# Altium PCB PCB.PcbDoc
Units mil, origin at the board's own origin, x right, y up, seen from the top; angles counter-clockwise.
Board outline 2285 x 2730 mil, 2 copper layers (Top Layer, Bottom Layer); 37 components, 18 nets, 92 pads, 0 vias.
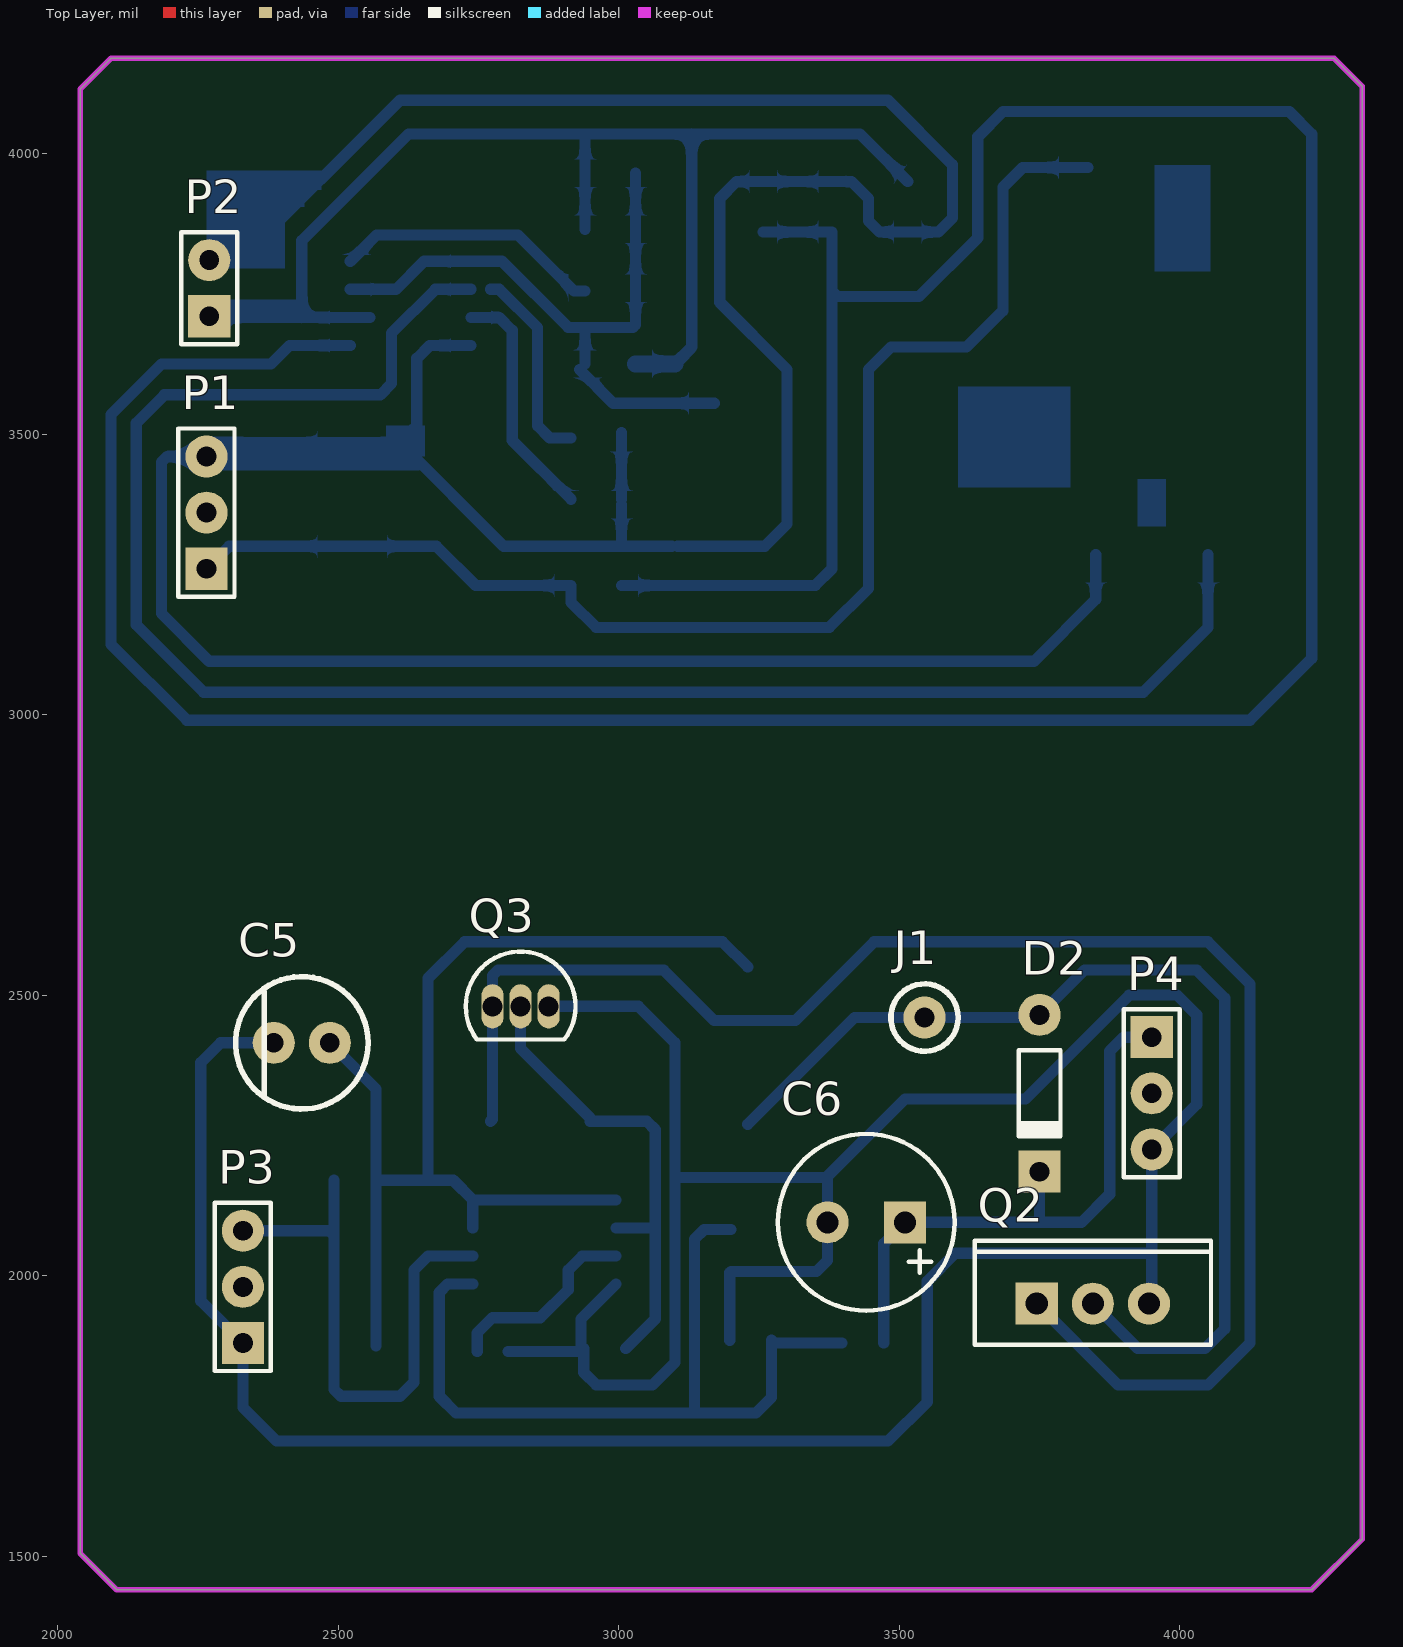
[diagram p0: Top Layer view]
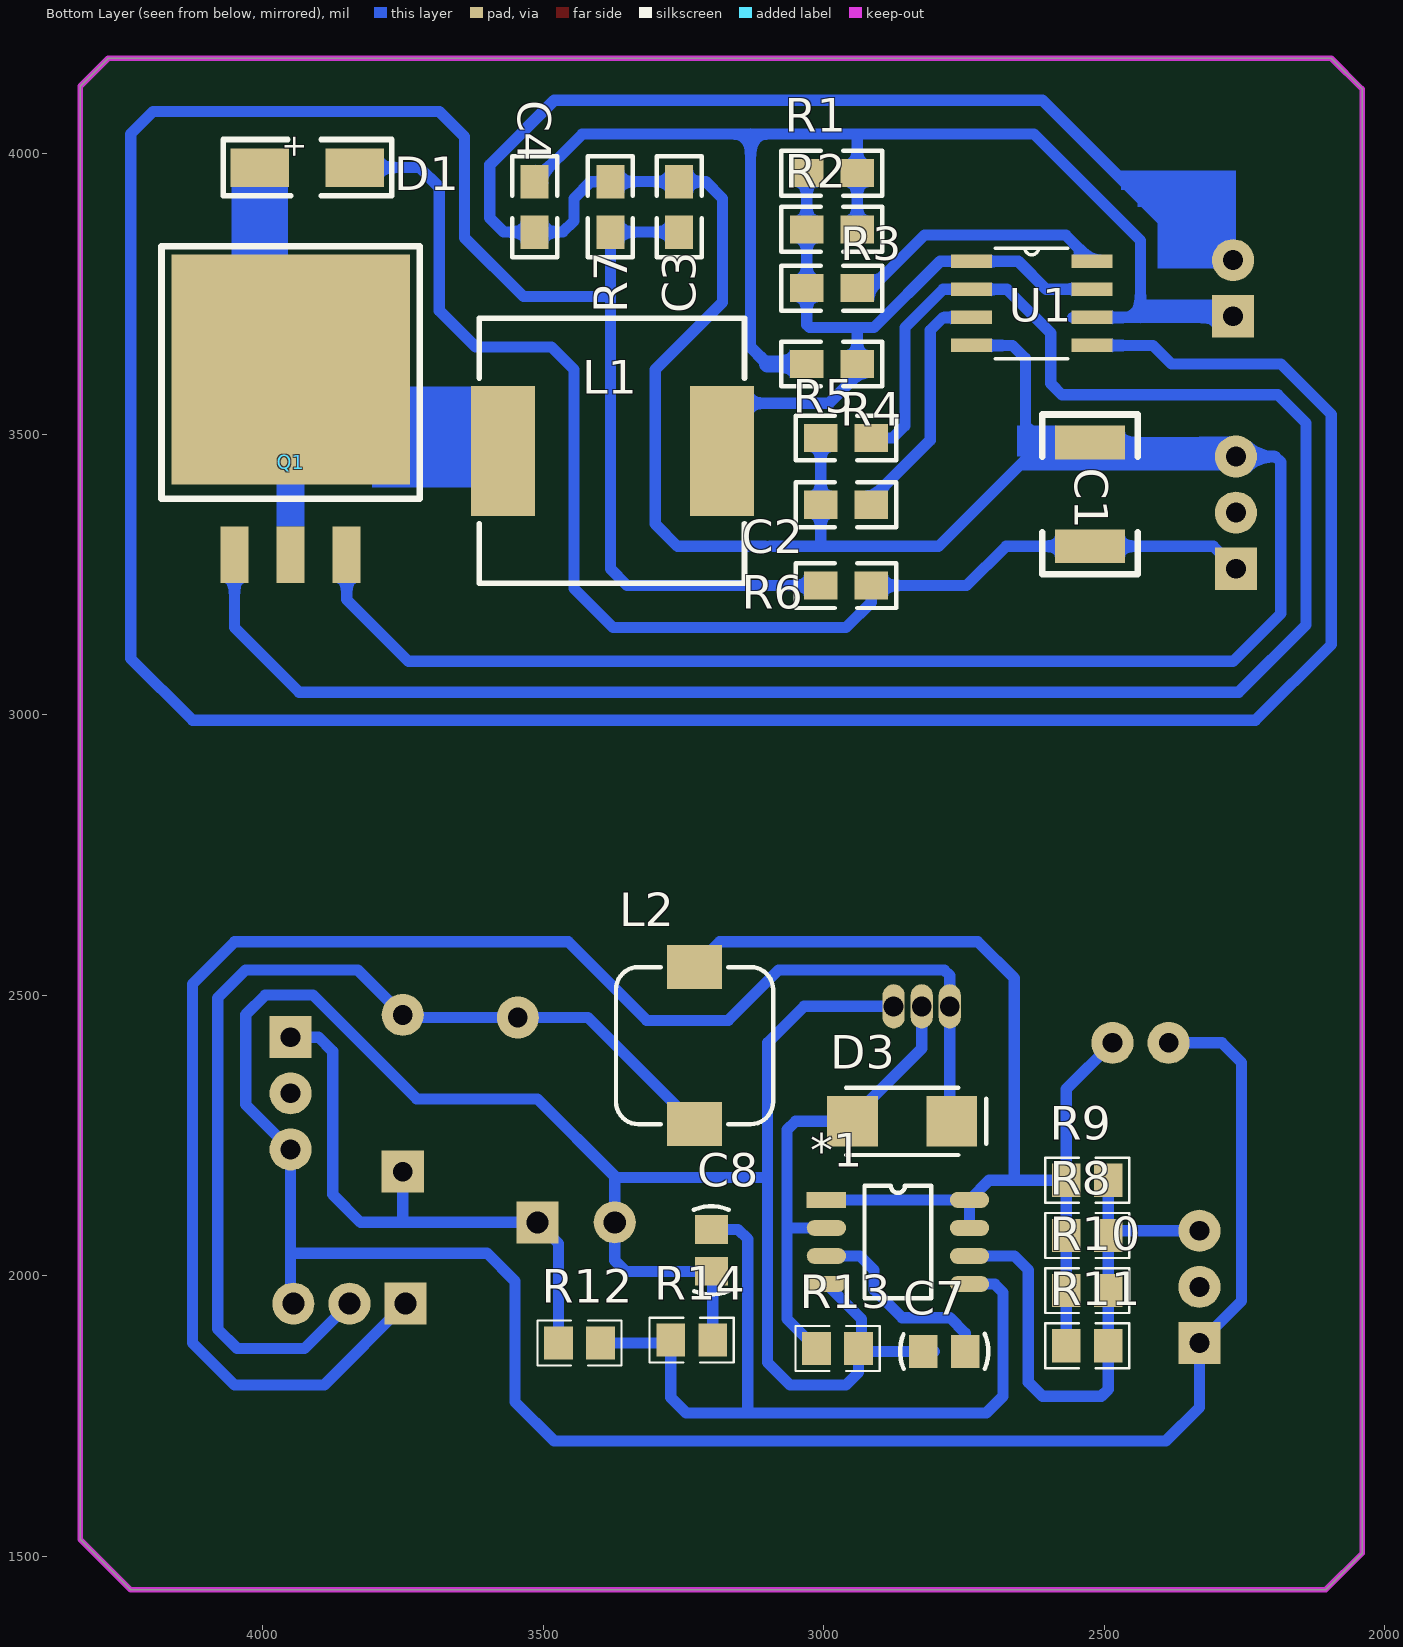
[diagram p1: Bottom Layer view, seen from below]

## Layer stack, top to bottom
Top Solder: solder mask 0.4, Solder Resist, Dk 3.5
Top Layer: signal copper 1.4
Dielectric 1: dielectric 12.6, FR-4, Dk 4.8
Bottom Layer: signal copper 1.4
Bottom Solder: solder mask 0.4, Solder Resist, Dk 3.5

## Board outline
2040,1505 2040,4115 2095,4170 4275,4170 4325,4120 4325,1530 4235,1440 2105,1440

## Design rules (kind name [scope] priority, off if disabled: settings)
Clearance [All] p1: gap=15
PolygonConnect [All] p1: connectstyle=Relief reliefconductorwidth=10 reliefentries=4 polygonreliefangle="90 Angle" airgapwidth=10
RoutingVias [All] p1: holewidth=28 width=50 viastyle="Through Hole" minholewidth=28 minwidth=50 maxholewidth=28 maxwidth=50
SolderMaskExpansion [All] p1: expansion=4
Width [All] p1: maxlimit=100 minlimit=8 preferedwidth=20
30 further rules are at their usual default settings.

## Classes and differential pairs
component class SCH: *1 C1 C2 C3 C4 C5 C6 C7 C8 D1 D2 D3 J1 L1 L2 P1 P2 P3 P4 Q1 Q2 Q3 R3 R4 R5 R6 R7 R8 R9 R10 R11 R12 R13 R14 U1

## Components (designator, comment, footprint, x,y, rotation, side; value= is the part's Value field where it differs from the comment)
*1 "MC34063" SOP-8 2995,2135 r180 bottom
C1 "Cap Pol3" 1812 2525,3300 r90 bottom
C2 "Cap" 0805 3005,3374 r180 bottom
C3 "Cap" 0805 3257.5,3950 r270 bottom
C4 "Cap" 0805 3515,3860 r90 bottom
C5 "Cap Pol" C-RB-6 2435,2415 r180 top
C6 "Cap Pol" C-RB-8 3510,2095 r180 top
C7 "Cap" C-RAD-0805 2785,1865 r180 bottom
C8 "Cap" C-RAD-0805 3200,2045 r90 bottom
D1 "FR107" DO-214AC 4005,3975 r180 bottom
D2 "Diode" DO-35 3750,2325 r270 top
D3 "Diode" DIODE-SMA 2860,2275 r180 bottom
J1 "CHECK" CHECK-A 3545,2460 r0 top
L1 "330uH" 330UH 3571,3470 r180 bottom
L2 "Inductor" L-SMD-7 3230,2410 r90 bottom
P1 "Header 3" HDR3X1_A 2265,3260 r90 top
P2 "Header 2" HDR2X1_A 2270,3710 r90 top
P3 "Header 3" HDR3X1_A 2330,1880 r90 top
P4 "Header 3" HDR3X1_A 3950,2425 r270 top
Q1 "IRF630" TO-263 4050,3285 r180 bottom
Q2 "IRF740" TO-220AB 3845,1950 r0 top
Q3 "MPSA55" TO-92A 2825,2480 r270 top
R1 "Res2" 0805 3030,3965 r180 bottom
R2 "Res2" 0805 3030,3865 r180 bottom
R3 "Res2" 0805 3030,3760 r180 bottom
R4 "Res2" 0805 2940,3625 r0 bottom
R5 "Res2" 0805 3005,3493 r180 bottom
R6 "Res2" 0805 2915,3230 r0 bottom
R7 "Res2" 0805 3380,3950 r270 bottom
R8 "Res1" 0805-1 2530,2071.67 r0 bottom
R9 "Res1" 0805-1 2530,2170 r0 bottom
R10 "Res1" 0805-1 2530,1973.33 r0 bottom
R11 "Res1" 0805-1 2530,1875 r0 bottom
R12 "Res1" 0805-1 3435,1880 r0 bottom
R13 "Res1" 0805-1 2975,1870 r0 bottom
R14 "Res1" 0805-1 3235,1885 r0 bottom
U1 "MC34063ADR2G" SO-8-M 2629,3733 r180 bottom

## Footprints (in the part's own frame and the unit in brackets; to place one, negate y for a bottom-side part, rotate by r counter-clockwise, add the part's x,y. Pads: shape width x height; smd on the part's side, far side on the other; paste and mask are expansions set on the pad)
330UH [mm]
  rect 2.9x5.9 smd: 1(0,0) 2(9.9,0)
  silkscreen extent -1.08,-6 10.92,6
0805 [mil]
  rect 60x50 smd: 1(0,0) 2(90,0)
  silkscreen extent -45,-40 135,40
0805-1 [mm] "贴片带丝印"
  rect 1.3x1.5 smd: 1(-0.95,0) 2(0.95,0)
  silkscreen extent -1.91,-1.02 1.91,1.02, body extent -1.14,-0.51 1.14,0.51, height 1
1812 [mil]
  rect 60x125 smd: 1(0,0) 2(185,0)
  silkscreen extent -50,-85 235,85
C-RAD-0805 [mm] "贴片电容"
  rect 1.3x1.5 smd: 1(-0.95,0) 2(0.95,0)
  silkscreen extent -2,-0.79 2,0.79, body extent -1.27,-0.64 1.27,0.64, height 0.9
C-RB-6 [mil]
  round 75 hole 35: 1(-50,0) 2(50,0)
  silkscreen extent -118,-118 118,118, body extent -118,-118 118,118, height 472
C-RB-8 [mm] "35V 220UF电容"
  rect 1.905x1.905 hole 1: 1(0,0)
  round 1.905 hole 1: 2(3.5,0)
  silkscreen extent -2.25,-4 5.75,4
CHECK-A [mm] "Connector; Plug"
  round 1.905 hole 0.9: 1(0,0)
  silkscreen extent -1.52,-1.52 1.52,1.52
DIODE-SMA [mm] "贴片二极管"
  rect 2.3x2.3 smd: 1(-2.25,0) 2(2.25,0)
  silkscreen extent -2.54,-1.52 3.81,1.52, body extent -2.92,-1.4 2.92,1.4, height 3
DO-35 [mm] "Diode, Axial; Body 3.8 x 1.9 mm (LxDia. max), Lead Dia. 0.53 mm (max)"
  round 1.905 hole 0.9: 1(-3.55,0)
  rect 1.905x1.905 hole 0.9: 2(3.55,0)
  silkscreen extent -1.95,-0.95 2.05,0.95
DO-214AC [mm]
  rect 2.65x1.75 smd: 1(4.3,0) 3(0,0)
  silkscreen extent -1.65,-1.27 5.97,1.27
HDR2X1_A [mm] "Connector; Header; 2 Position"
  rect 1.905x1.905 hole 0.9: 1(0,0)
  round 1.905 hole 0.9: 2(2.54,0)
  silkscreen extent -1.27,-1.27 3.81,1.27
HDR3X1_A [mm] "Connector; Header; 3 Position"
  rect 1.905x1.905 hole 0.9: 1(0,0)
  round 1.905 hole 0.9: 2(2.54,0) 3(5.08,0)
  silkscreen extent -1.27,-1.27 6.35,1.27
L-SMD-7 [mm] "贴片电感7*7"
  rect 2x2.5 smd: 1(-3.556,0) 2(3.556,0)
  silkscreen extent -3.56,-3.56 3.56,3.56, body extent -3.56,-3.56 3.56,3.56, height 4
SO-8-M [mil]
  rect 73x24 smd: 1(-107.5,75) 2(-107.5,25) 3(-107.5,-25) 4(-107.5,-75) 5(107.5,-75) 6(107.5,-25) 7(107.5,25) 8(107.5,75)
  silkscreen extent -65,-99 65,99
SOP-8 [mm]
  rect 1.78x0.72 smd: 1(0,0)
  oval 1.78x0.72 smd: 2(0,-1.27) 3(0,-2.54) 4(0,-3.81) 5(6.48,-3.81) 6(6.48,-2.54) 7(6.48,-1.27) 8(6.48,0)
  silkscreen extent 1.72,-4.45 4.76,0.63, body extent 0.63,-4.45 5.71,0.63, height 10
TO-92A [mm]
  oval 2x1 hole 0.9: 1(0,-1.27) 2(0,0) 3(0,1.27)
  silkscreen extent -2.48,-2.48 1.5,2.48
TO-220AB [mm] "TO, Thru-Hole, Vertical, Heatsink Mounted; 3 In-Line Leads; Pitch 2.54 mm"
  round 1.905 hole 1: D(0,0) S(2.54,0)
  rect 1.905x1.905 hole 1: G(-2.54,0)
  silkscreen extent -5.35,-1.85 5.35,2.85, body extent -5.33,-1.78 5.33,2.79, height 4
TO-263 [mil]
  rect 50x100 smd: 1(0,0) 2(100,0) 3(200,0)
  rect 425x410 smd: 2(100,330)
  silkscreen extent -130,100 330,550

## Part data
C1: "Polarized Capacitor (Surface Mount)"
C2 C3 C4: "Capacitor"
C5 C6: "极性电解电容"
C7 C8: "无极性电容"
D1: library part "Diode 18TQ045", "Schottky Rectifier"
D2 D3: "二极管"
J1: "测试点"
L1: library part L
L2: "电感"
P1 P2 P3 P4: "接插件"
Q1: "N-Channel MOSFET"
Q2: library part MOSFET-N, "N-Channel MOSFET"
Q3: library part S8550, "PNP三极管"
R1 R2 R3 R4 R5 R6 R7: "Resistor"
R8 R9 R10 R11 R12 R13 R14: "贴片电阻"
U1: library part MC34063ACD-TR, "Imported"

## Nets (pads, with @x,y where several pads share a name; then routed paths per layer and width w, separated by ;. In a path a pad name is that pad's centre, name@x,y a point inside that pad or via, vN(x,y) a via of type N, cw(c..) or ccw(c..) an arc to the next point about the centre after c; other vN are vias at no path point)
GND: C1.2 C2.1 C3.1 C4.1 P1.3 P2.2 Q1.3 R5.1 R7.1 U1.4 | length 6485.9
  Bottom Layer w20: P2.2 2325,3810 2610,4095 3480,4095 3595,3980 3595,3885 3570,3860 C4.1 3465,3860 3445,3880 3445,3920 3415,3950 R7.1 C3.1 3210,3950 3180,3920 3180,3735 3300,3615 3300,3340 3260,3300 3105,3300 ; U1.4 2663,3658 2640,3635 2640,3515 2610,3485 ; C2.1 3005,3305 3000,3300 ; C2.1@3005,3384 R5.1 R5.1@3005,3503 ; 3095,3300 3000,3300 ; Q1.3 3850,3205 3740,3095 2270,3095 2185,3180 2185,3450 2195,3460 P1.3 2290,3485 C1.2 2610,3485 ; 2610,3485 2795,3300 3000,3300
GND2: *1.4 C5.2 C6.2 C7.1 C8.1 P3.1 P4.3 Q2.S Q3.3 R13.1 R14.1 | length 6101.3
  Bottom Layer w20: C5.2 2290,2415 2255,2380 2255,1955 P3.1 2330,1765 2390,1705 3480,1705 3550,1775 3550,1990 3600,2040 3945,2040 ; C7.1@2802.4,1865 2932.6,1865 2932.6,1922.6 *1.4 ; Q3.3 3035,2480 3100,2415 3100,1845 3060,1805 2960,1805 2937.6,1827.4 R13.1 ; 3105,2175 3372.2,2175 ; R14.1 3197.6,2005.2 C8.1 3352.6,2007.6 3372.2,2027.2 C6.2 3372.2,2177.2 3510,2315 3725,2315 3910,2500 3995,2500 4030,2465 4030,2305 P4.3 3950,1955 Q2.S
Net*1_1: *1.1 *1.7 *1.8 C5.1 L2.2 R8.2 R9.2 R10.2 R11.2 | length 2041.8
  Bottom Layer w20: C5.1 2567.4,2332.6 R9.2 ; R11.2 R10.2 R8.2 R9.2 ; *1.7 *1.8 ; *1.1 *1.8 ; L2.2 3185,2595 2725,2595 2660,2530 2660,2170 ; R9.2 2660,2170 ; 2660,2170 2704.88,2170 *1.8
Net*1_2: *1.2 D3.1 Q3.2 R13.2 | length 864.7
  Bottom Layer w20: Q3.2 2825,2405 2948.58,2281.42 D3.1 3050,2275 3065,2260 3065,2090 3060,2085 3065,2080 3065,1922.6 R13.2 ; *1.2 3065,2085
Net*1_3: *1.3 C7.2 | length 357.4
  Bottom Layer w20: C7.2 2747.6,1897.6 2775,1925 2860,1925 2910,1975 2910,2010 2935,2035 *1.3
Net*1_5: *1.5 C8.2 R12.1 R14.2 | length 1479.2
  Bottom Layer w20: *1.5 2695,1985 2680,1970 2680,1785 2710,1755 3244.8,1755 3272.4,1782.6 R14.2 3277.4,1880 R12.1 ; 3135,1755 3135,2065 3152.4,2082.4 C8.2
NetC2_2: C2.2 U1.3 | length 427.5
  Bottom Layer w20: U1.3 2787,3708 2810,3685 2810,3489 C2.2@2915,3384
NetC3_2: C3.2 R6.2 R7.2 U1.5 | length 6291.7
  Bottom Layer w20: U1.5 2413,3658 2380,3625 2185,3625 2095,3535 2095,3125 2230,2990 4125,2990 4235,3100 4235,4035 4195,4075 3685,4075 3640,4030 3640,3850 3535,3745 3390,3745 3380,3755 ; R6.2 3350,3230 3380,3260 3380,3755 ; C3.2 R7.2 3380,3755
NetD1_3: D1.3 L1.1 Q1.2
NetD2_1: D2.1 J1.1 L2.1 Q2.D | length 1857.3
  Bottom Layer w20: L2.1 3420,2460 J1.1 3745.24,2460 D2.1 3830.24,2545 4030,2545 4080,2495 4080,1905 4045,1870 3925,1870 Q2.D
NetD3_2: D3.2 Q2.G Q3.1 | length 2853.1
  Bottom Layer w20: D3.2 2775,2278.58 Q3.1 2775,2535 2785,2545 3080,2545 3170,2455 3315,2455 3455,2595 4050,2595 4125,2520 4125,1880 4050,1805 3890,1805 Q2.G
NetL1_2: L1.2 R1.1 R2.1 R3.1 R4.1 U1.1 U1.7 | length 1182.1
  Bottom Layer w20: U1.7 2603,3758 2653,3808 U1.1 2792,3808 2910,3690 2945,3690 ; R4.1@2930,3615 2990,3555 L1.2@3170,3555 ; R4.1 2940,3685 2945,3690 ; R1.1 R2.1 R3.1 3030,3695 3025,3690 2945,3690
NetQ1_1: Q1.1 R5.2 U1.2 | length 3600.9
  Bottom Layer w20: U1.2 2673,3758 2595,3680 2595,3590 2575,3570 2190,3570 2140,3520 2140,3160 2260,3040 3935,3040 4050,3155 Q1.1 ; U1.2@2771.5,3758 2787,3758 2855,3690 2855,3515 2877,3493 R5.2
NetR3_2: R3.2 U1.8 | length 479.4
  Bottom Layer w20: U1.8 2568.5,3855 2820,3855 2920,3755 R3.2@2940,3755
VCC12: C4.2 P2.1 R1.2 R2.2 R4.2 U1.6 | length 2282.7
  Bottom Layer w20: P2.1 2272,3708 2435,3708 ; U1.6@2556.5,3708 2435,3708 ; R2.2 R1.2 2940,4030 2945,4035 ; 3100,3625 3130,3655 3130,4035 ; C4.2 3430,4035 2945,4035 ; 2435,3708 2435,3845 2625,4035 2945,4035
  Bottom Layer w30: R4.2 3100,3625
VH: C1.1 D1.1 P1.1 R6.1 | length 2361.9
  Bottom Layer w20: P1.1 2305,3300 C1.1 2675,3300 2745,3230 R6.1 2915,3200 2960,3155 3375,3155 3445,3225 3445,3615 3485,3655 3620,3655 3685,3720 3685,3940 3720,3975 D1.1
VIN: *1.6 P3.3 R8.1 R9.1 R10.1 R11.1 | length 1011.8
  Bottom Layer w20: P3.3 2484.27,2080 R8.1 ; R9.1 R8.1 ; *1.6 2660,2035 2635,2010 2635,1810 2610,1785 2505,1785 2492.6,1797.4 R11.1 R10.1 R8.1
VOUT: C6.1 D2.2 P4.1 R12.2 | length 1046.9
  Bottom Layer w20: R12.2 3472.4,2057.4 C6.1 3750,2095 ; D2.2 3750,2095 ; P4.1 3900,2425 3875,2400 3875,2145 3825,2095 3750,2095
pads on no net: P1.2 P3.2 P4.2

## Keep-outs
Keep-Out Layer:
  the board outline again, w10

## Other copper
Bottom Layer:
  rectangle net VCC12: 2295,3715 2445,3740
  rectangle net GND: 2390,3905 2440,3935
  rectangle net GND: 2390,3935 2470,3970
  rectangle net GND: 2265,3795 2405,3970
  rectangle net GND: 2260,3435 2645,3485
  rectangle net GND: 2585,3460 2655,3515
  rectangle net NetD1_3: 3955,3790 4055,3980
  rectangle net NetD1_3: 3925,3335 3975,3420
  rectangle net NetD1_3: 3605,3405 3805,3585

## Text inside footprints (layer, text, board x,y; h text height)
D1: Bottom Overlay "+" at 3960,4035 h39.37 r90